# Altium PCB PCB.PcbDoc
Units mm, origin at the board's own origin, x right, y up, seen from the top; angles counter-clockwise.
Board outline 44 x 22 mm, 2 copper layers (Top Layer, Bottom Layer), stack 1.671 mm thick; 26 components, 19 nets, 72 pads, 21 vias.
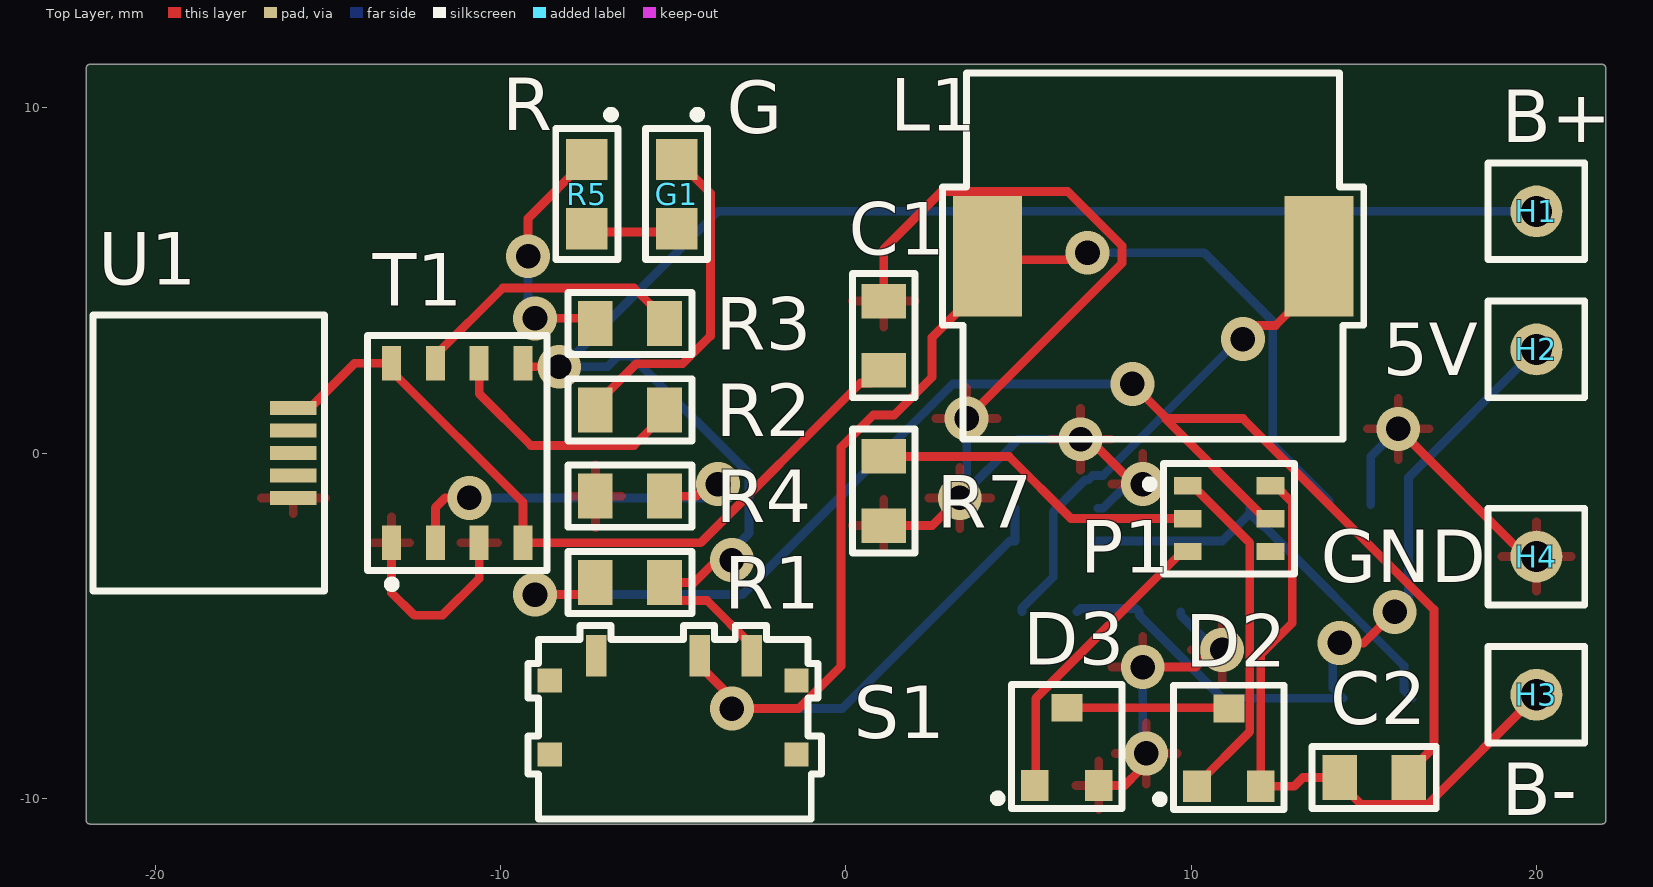
[diagram p0: Top Layer view]
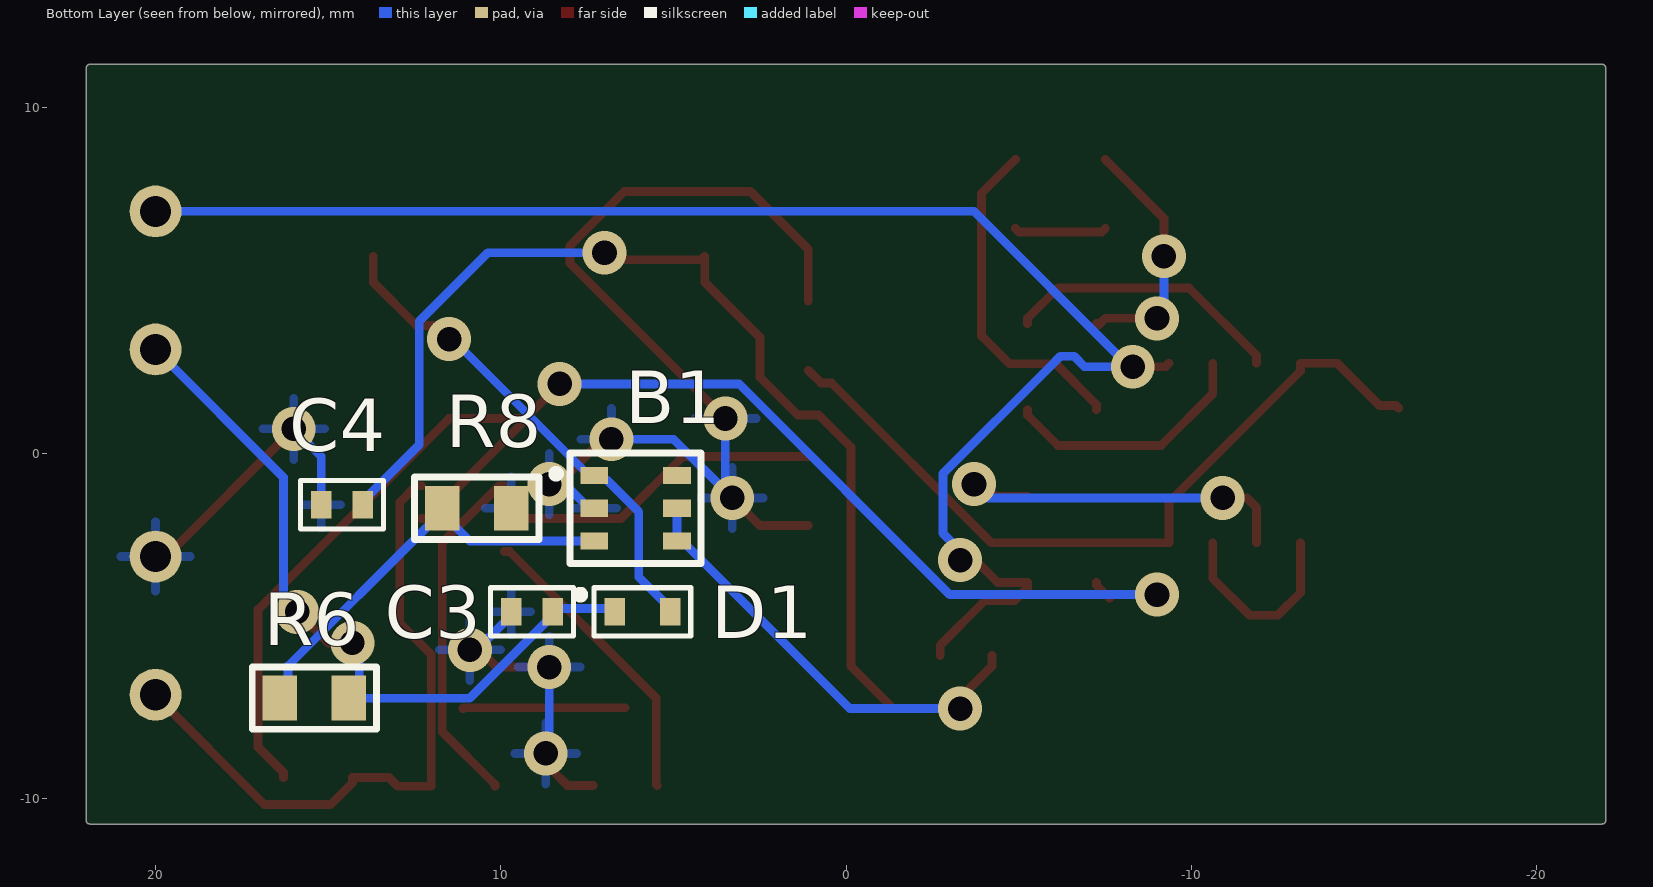
[diagram p1: Bottom Layer view, seen from below]
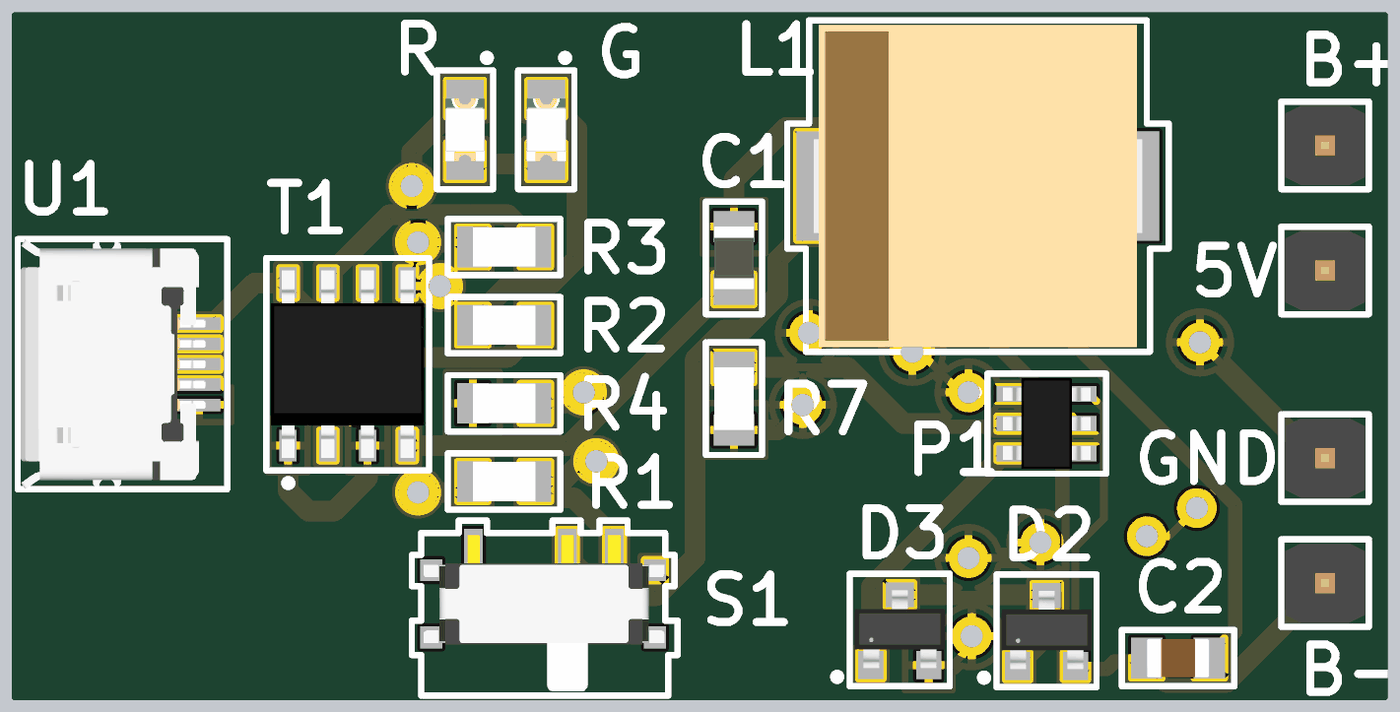
[diagram p2: 3D render of the assembled board from above, using the file's embedded part models]
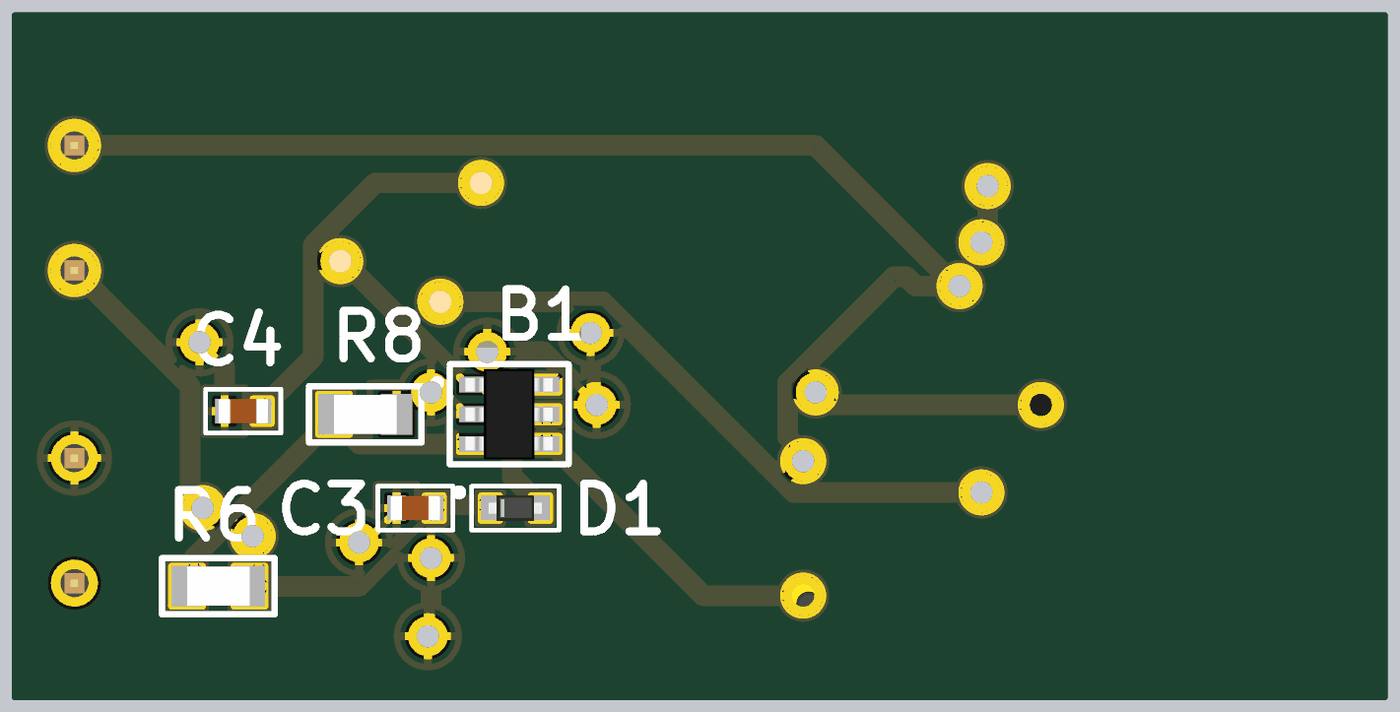
[diagram p3: 3D render of the assembled board from below, using the file's embedded part models]

## Layer stack, top to bottom
Top Solder: solder mask 0.0102, Solder Resist, Dk 3.5
Top Layer: signal copper 0.0356
Dielectric 1: dielectric 1.6, FR-4, Dk 4.8
Bottom Layer: signal copper 0.0356
Bottom Solder: solder mask 0.0102, Solder Resist, Dk 3.5

## Board outline
-21.894,-10.744 cw(c-21.894,-10.644) -21.994,-10.644 -21.994,11.156 cw(c-21.894,11.156) -21.894,11.256 21.906,11.256 cw(c21.906,11.156) 22.006,11.156 22.006,-10.644 cw(c21.906,-10.644) 21.906,-10.744

## Design rules (kind name [scope] priority, off if disabled: settings)
Clearance [All] p1: gap=0 ignorepadtopadclearanceinfootprint=FALSE
HoleToHoleClearance [All] p1: gap=0.1 allowstackedmicrovias=TRUE
MinimumSolderMaskSliver [All] p1: minsoldermaskwidth=0
PolygonConnect [All] p1: connectstyle=Relief reliefconductorwidth=0.254 reliefentries=4 polygonreliefangle="90 Angle" airgapwidth=0.254
RoutingVias [All] p1: holewidth=0.3 width=0.6 viastyle="Through Hole" minholewidth=0.3 minwidth=0.6 maxholewidth=0.3 maxwidth=0.6
SilkToSilkClearance [All] p1: silktosilkclearance=0
SilkToSolderMaskClearance [IsPad] p1: minsilkscreentomaskgap=0 clearancetoexposedcopper=TRUE
SolderMaskExpansion [All] p1: expansion=0.102 istentingtop=FALSE
Width [All] p1: maxlimit=0.254 minlimit=0.254 preferedwidth=0.254
26 further rules are at their usual default settings.

## Components (designator, comment, footprint, x,y, rotation, side; value= is the part's Value field where it differs from the comment)
B1 "MT3608" "BOOST CONVERTER" 6.1,-1.6 r180 bottom
C1 "10uF" "10UF CAPACITOR" 1.1,3.4 r270 top
C2 "0.1uF" "0.1UF CAPACITOR" 15.3,-9.4 r0 top
C3 "22uF" "22UF CAPACITOR" 9.1,-4.6 r180 bottom
C4 "22uF" "22UF CAPACITOR" 14.6,-1.5 r180 bottom
D1 "Schottky Diode" DIODE 5.9,-4.6 r180 bottom
D2 "N-Channel MOSFET" MOSFET 11.095,-8.525 r0 top
D3 "N-Channel MOSFET" MOSFET 6.4,-8.5 r0 top
G1 "Green LED" "GREEN LED" -4.9,7.5 r270 top
H1 "1x1 Header" "HEADER 1X1" 20,7 r0 top
H2 "1x1 Header" "HEADER 1X1" 20,3 r0 top
H3 "1x1 Header" "HEADER 1X1" 20,-7 r0 top
H4 "1x1 Header" "HEADER 1X1" 20,-3 r0 top
L1 "22uH" "22UH INDUCTOR" 8.9,5.7 r0 top
P1 "Protection IC" "PROTECTION IC" 11.1,-1.9 r0 top
R1 "100 Ohms" "100 OHMS" -6.25,-3.75 r0 top
R2 "1K Ohms" "1K RESISTOR" -6.25,1.25 r0 top
R3 "1K Ohms" "1K RESISTOR" -6.25,3.75 r0 top
R4 "2K Ohms" "2K RESISTOR" -6.25,-1.25 r0 top
R5 "Red LED" "RED LED" -7.5,7.5 r270 top
R6 "7.5K Ohms" "7.5K RESISTOR" 15.4,-7.1 r180 bottom
R7 "2K Ohms" "2K RESISTOR" 1.1,-1.1 r90 top
R8 "1K Ohms" "1K RESISTOR" 10.7,-1.6 r0 bottom
S1 "CUS-12TB" "SLIDE SWITCH" -5,-7.3 r180 top
T1 "TP4056" TP4056 -11.25,0 r90 top
U1 "Micro USB" "MICRO USB" -16,0 r90 top

## Footprints (in the part's own frame and the unit in brackets; to place one, negate y for a bottom-side part, rotate by r counter-clockwise, add the part's x,y. Pads: shape width x height; smd on the part's side, far side on the other; paste and mask are expansions set on the pad)
"0.1UF CAPACITOR" [mm]
  rect 1x1.3 smd: 1(-1,0) 2(1,0)
  silkscreen extent -1.8,-0.9 1.8,0.9, body extent -1,-0.62 1,0.63, height 1.4
"1K RESISTOR" [mm]
  rect 1x1.3 smd: 1(-1,0) 2(1,0)
  silkscreen extent -1.8,-0.9 1.8,0.9, body extent -1,-0.62 1,0.62, height 0.61
"2K RESISTOR" [mm]
  rect 1x1.3 smd: 1(-1,0) 2(1,0)
  silkscreen extent -1.8,-0.9 1.8,0.9, body extent -1,-0.62 1,0.62, height 0.66
"7.5K RESISTOR" [mm]
  rect 1x1.3 smd: 1(-1,0) 2(1,0)
  silkscreen extent -1.8,-0.9 1.8,0.9, body extent -1,-0.62 1,0.63, height 0.61
"10UF CAPACITOR" [mm]
  rect 1x1.3 smd: 1(-1,0) 2(1,0)
  silkscreen extent -1.8,-0.9 1.8,0.9, body extent -1,-0.62 1,0.62, height 0.58
"22UF CAPACITOR" [mm]
  rect 0.6x0.8 smd: 1(-0.6,0) 2(0.6,0)
  silkscreen extent -1.2,-0.7 1.2,0.7, body extent -0.8,-0.4 0.8,0.4, height 1
"22UH INDUCTOR" [mm]
  rect 2x3.5 smd: 1(-4.8,0) 2(4.8,0)
  silkscreen extent -6.1,-5.3 6.1,5.3, body extent -5.25,-5.15 5.25,5.15, height 5.05
"100 OHMS" [mm]
  rect 1x1.3 smd: 1(-1,0) 2(1,0)
  silkscreen extent -1.8,-0.9 1.8,0.9, body extent -1,-0.62 1,0.62, height 0.61
"BOOST CONVERTER" [mm]
  rect 0.8x0.5 smd: 1(-1.2,0.95) 2(-1.2,0) 3(-1.2,-0.95) 4(1.2,-0.95) 5(1.2,0) 6(1.2,0.95)
  silkscreen extent -2.4,-1.6 1.9,1.6, body extent -1.4,-1.45 1.4,1.45, height 1.11
DIODE [mm]
  rect 0.6x0.8 smd: 1(-0.8,0) 2(0.8,0)
  silkscreen extent -1.9,-0.7 1.4,0.7, body extent -0.85,-0.41 0.85,0.41, height 0.72
"GREEN LED" [mm]
  rect 1.2x1.2 smd: 1(-1,0) 2(1,0)
  silkscreen extent -2.4,-0.9 1.9,0.9, body extent -1,-0.62 1,0.63, height 0.7
"HEADER 1X1" [mm]
  round 1.5 hole 0.9: 1(0,0)
  silkscreen extent -1.4,-1.4 1.4,1.4, body extent -1.27,-1.27 1.27,1.27, height 5.55
"MICRO USB" [mm]
  rect 0.4x1.35 smd: 1(1.3,0) 2(0.65,0) 3(0,0) 4(-0.65,0) 5(-1.3,0)
  silkscreen extent -4,-0.9 4,5.8, body extent -4,-0.2 4,5.7, height 2.69
MOSFET [mm]
  rect 0.8x0.9 smd: 1(-0.925,-1.125) 3(0.925,-1.125)
  rect 0.9x0.8 smd: 2(0.005,1.125)
  silkscreen extent -2.1,-1.8 1.6,1.8, body extent -1.44,-1.22 1.45,1.27, height 1.09
"PROTECTION IC" [mm]
  rect 0.8x0.5 smd: 1(-1.2,0.95) 2(-1.2,0) 3(-1.2,-0.95) 4(1.2,-0.95) 5(1.2,0) 6(1.2,0.95)
  silkscreen extent -2.4,-1.6 1.9,1.6, body extent -1.4,-1.45 1.4,1.45, height 1.11
"RED LED" [mm]
  rect 1.2x1.2 smd: 1(-1,0) 2(1,0)
  silkscreen extent -2.4,-0.9 1.9,0.9, body extent -1,-0.62 1,0.63, height 0.71
"SLIDE SWITCH" [mm]
  rect 0.6x1.2 smd: 1(-2.275,-1.435) 2(-0.775,-1.435) 3(2.225,-1.435)
  rect 0.7x0.7 smd: 4(-3.575,-0.715) 5(-3.575,1.435) 6(3.575,-0.715) 7(3.575,1.435)
  silkscreen extent -4.3,-2.3 4.2,3.3, body extent -3.88,-1.83 3.82,3.17, height 1.41
TP4056 [mm]
  rect 1x0.55 smd: 1(-2.6,1.905) 2(-2.6,0.635) 3(-2.6,-0.635) 4(-2.6,-1.905) 5(2.6,-1.905) 6(2.6,-0.635) 7(2.6,0.635) 8(2.6,1.905)
  silkscreen extent -3.9,-2.6 3.4,2.6, body extent -3,-2.45 3,2.45, height 1.38

## Part data
B1: "BOOST CONVERTER IC"
C1: library part CC0805ZKY5V5BB106, "Cap Ceramic 10uF 6.3V Y5V -20% to 80% Pad SMD 0805 85C Automotive T/R", Case Code (Imperial)=0805, Case Code (Metric)=2012, Dielectric=Y5V, Manufacturer=Yageo, Max Operating Temperature=85°C, Min Operating Temperature=-30°C, Package Quantity=1, Supplier Part Number 1=311-1462-1-ND, Tolerance=80%, Voltage Rating=6.3V, Capacitance=10uF, Case/Package=0805, Category="Ceramic Capacitors", ComponentLink1Description=https://datasheet.ciiva.com/180/mlccorderingcode-180353.pdf?src-supplier=Digi-Key, ComponentLink1URL=https://datasheet.ciiva.com/180/mlccorderingcode-180353.pdf?src-supplier=Digi-Key, ComponentLink2Description=https://datasheet.ciiva.com/180/mlccorderingcode-180354.pdf?src-supplier=Digi-Key, ComponentLink2URL=https://datasheet.ciiva.com/180/mlccorderingcode-180354.pdf?src-supplier=Digi-Key, ComponentLink3Description=https://datasheet.ciiva.com/180/mlccorderingcode-180355.pdf?src-supplier=Digi-Key, ComponentLink3URL=https://datasheet.ciiva.com/180/mlccorderingcode-180355.pdf?src-supplier=Digi-Key, ComponentLink4Description=https://datasheet.ciiva.com/11465/upy-gphc-y5v-6-3v-to-50v-5-11465830.pdf?src-supplier=Avnet, ComponentLink4URL=https://datasheet.ciiva.com/11465/upy-gphc-y5v-6-3v-to-50v-5-11465830.pdf?src-supplier=Avnet, ComponentLink5Description=https://datasheet.ciiva.com/17436/upy-gphc-y5v-6-3v-to-50v-5-17436535.pdf?src-supplier=Avnet+Europe, ComponentLink5URL=https://datasheet.ciiva.com/17436/upy-gphc-y5v-6-3v-to-50v-5-17436535.pdf?src-supplier=Avnet+Europe, ComponentLink6Description=https://datasheet.ciiva.com/13211/upy-gp-np0-16v-to-50v-8-13211102.pdf?src-supplier=Mouser, ComponentLink6URL=https://datasheet.ciiva.com/13211/upy-gp-np0-16v-to-50v-8-13211102.pdf?src-supplier=Mouser, Composition=Ceramic, Depth=1.25mm, Halogen Free="Halogen Free", Height=1.25mm, Lead Free="Lead Free", Length=2mm, Manufacturer Part Number=CC0805ZKY5V5BB106, Mount="Surface Mount", Number of Pins=2, Packaging="Tape and Reel", Pricing 1="1=0.18000, 10=0.12600, 50=0.07560, 100=0.06380, 500=0.04364, 1000=0.03861 (USD)", Radiation Hardening=No, RoHS=Yes, Stock 1=41988, Supplier 1=Digi-Key, Thickness=0.057inch, Voltage Rating (DC)=6.3V, Width=0.049inch
C2: library part GCM21BR72A104KA37L, "CAP CER 0.1UF 100V X7R 0805", Capacitance=100nF, Case Code (Imperial)=0805, Case Code (Metric)=2012, Dielectric=X7R, Manufacturer=Murata, Max Operating Temperature=125°C, Min Operating Temperature=-55°C, Package Quantity=1, Ratings=AEC-Q200, Supplier Part Number 1=490-4789-1-ND, Tolerance=10%, Voltage=100V, Case/Package=0805, Category="Ceramic Capacitors", ComponentLink1Description=https://datasheet.ciiva.com/2989/product-2989248.pdf?src-supplier=Avnet, ComponentLink1URL=https://datasheet.ciiva.com/2989/product-2989248.pdf?src-supplier=Avnet, ComponentLink2Description=https://datasheet.ciiva.com/18183/getdatasheetpartid-248062-18183712.pdf?src-supplier=Verical, ComponentLink2URL=https://datasheet.ciiva.com/18183/getdatasheetpartid-248062-18183712.pdf?src-supplier=Verical, ComponentLink3Description=https://datasheet.ciiva.com/11786/0900766b80ef92d0-11786205.pdf?src-supplier=RSComponents, ComponentLink3URL=https://datasheet.ciiva.com/11786/0900766b80ef92d0-11786205.pdf?src-supplier=RSComponents, ComponentLink4Description=https://datasheet.ciiva.com/135/product-135646.pdf?src-supplier=Digi-Key, ComponentLink4URL=https://datasheet.ciiva.com/135/product-135646.pdf?src-supplier=Digi-Key, ComponentLink5Description=https://datasheet.ciiva.com/135/product-135647.pdf?src-supplier=Digi-Key, ComponentLink5URL=https://datasheet.ciiva.com/135/product-135647.pdf?src-supplier=Digi-Key, ComponentLink6Description=https://datasheet.ciiva.com/135/product-135648.pdf?src-supplier=Digi-Key, ComponentLink6URL=https://datasheet.ciiva.com/135/product-135648.pdf?src-supplier=Digi-Key, ComponentLink7Description=https://datasheet.ciiva.com/48671/product-48671358.pdf?src-supplier=Avnet, ComponentLink7URL=https://datasheet.ciiva.com/48671/product-48671358.pdf?src-supplier=Avnet, ComponentLink8Description=https://datasheet.ciiva.com/16449/product-16449295.pdf?src-supplier=Future+Electronics, ComponentLink8URL=https://datasheet.ciiva.com/16449/product-16449295.pdf?src-supplier=Future+Electronics, Depth=1.25mm, Height=1.25mm, Lead Free="Lead Free", Length=2mm, Manufacturer Part Number=GCM21BR72A104KA37L, Mount="Surface Mount", Packaging="Tape and Reel", Pricing 1="1=0.31000, 10=0.20900, 50=0.13940, 100=0.11850, 500=0.08366, 1000=0.07321 (USD)", Radiation Hardening=No, REACH SVHC="No SVHC", RoHS=Yes, Stock 1=11397818, Supplier 1=Digi-Key, Termination=SMD/SMT, Thickness=0.055inch, Voltage Rating=100V, Voltage Rating (DC)=100V, Width=0.049inch
C3 C4: library part GRM188C80J226ME15D, "CAP CER 22UF 6.3V X6S 0603", Case Code (Imperial)=0603, Case Code (Metric)=1608, Dielectric=X6S, Manufacturer=Murata, Max Operating Temperature=105°C, Min Operating Temperature=-55°C, Package Quantity=4000, Supplier Part Number 1=490-10471-1-ND, Tolerance=20%, Voltage Rating=6.3V, Capacitance=22uF, Case/Package=0603, Category="Ceramic Capacitors", ComponentLink1Description=http://www.mouser.com/ds/2/281/c02e-2905.pdf?src-supplier=Mouser, ComponentLink1URL=http://www.mouser.com/ds/2/281/c02e-2905.pdf?src-supplier=Mouser, ComponentLink2Description=http://search.murata.co.jp/Ceramy/image/img/A01X/partnumbering_e_01.pdf?src-supplier=Digi-Key, ComponentLink2URL=http://search.murata.co.jp/Ceramy/image/img/A01X/partnumbering_e_01.pdf?src-supplier=Digi-Key, ComponentLink3Description=http://search.murata.co.jp/Ceramy/image/img/A01X/G101/ENG/GRM188C80J226ME15-01.pdf?src-supplier=Digi-Key, ComponentLink3URL=http://search.murata.co.jp/Ceramy/image/img/A01X/G101/ENG/GRM188C80J226ME15-01.pdf?src-supplier=Digi-Key, Height=0.8mm, Lead Free="Lead Free", Length=0.063inch, Manufacturer Part Number=GRM188C80J226ME15D, Mount="Surface Mount", Packaging="Tape and Reel", Pricing 1="1=0.32000, 10=0.21900, 50=0.14560, 100=0.12380, 500=0.08742, 1000=0.07648 (USD)", RoHS=Yes, Stock 1=219534, Supplier 1=Digi-Key, Termination=SMD/SMT, Thickness=0.039inch, Voltage Rating (DC)=6.3V, Weight=0.000222oz, Width=0.8mm
D1: library part SDM03U40-7, "Diode Schottky 40V 0.03A 2Pin SOD523", Average Rectified Current=30mA, Capacitance=6pF, Forward Voltage=370mV, Manufacturer=Diodes, Max Forward Surge Current (Ifsm)=200mA, Max Operating Temperature=125°C, Max Power Dissipation=150mW, Max Repetitive Reverse Voltage (Vrrm)=40V, Max Reverse Voltage (DC)=30V, Min Operating Temperature=-40°C, Package Quantity=3000, Peak Reverse Current=500nA, Supplier Part Number 1=SDM03U40DICT-ND, Category="Rectifier Diodes", ComponentLink1Description=https://datasheet.ciiva.com/4715/ds30392-87516-4715617.pdf?src-supplier=Mouser, ComponentLink1URL=https://datasheet.ciiva.com/4715/ds30392-87516-4715617.pdf?src-supplier=Mouser, ComponentLink2Description=https://datasheet.ciiva.com/8301/ds30392-8301153.pdf?src-supplier=Avnet, ComponentLink2URL=https://datasheet.ciiva.com/8301/ds30392-8301153.pdf?src-supplier=Avnet, ComponentLink3Description=https://datasheet.ciiva.com/15144/getdatasheetpartid-38927-15144053.pdf?src-supplier=Verical, ComponentLink3URL=https://datasheet.ciiva.com/15144/getdatasheetpartid-38927-15144053.pdf?src-supplier=Verical, ComponentLink4Description=https://datasheet.ciiva.com/912/ds30392-912843.pdf?src-supplier=Digi-Key, ComponentLink4URL=https://datasheet.ciiva.com/912/ds30392-912843.pdf?src-supplier=Digi-Key, ComponentLink5Description=https://datasheet.ciiva.com/912/ds30392-912844.pdf?src-supplier=Digi-Key, ComponentLink5URL=https://datasheet.ciiva.com/912/ds30392-912844.pdf?src-supplier=Digi-Key, ComponentLink6Description=https://datasheet.ciiva.com/912/ds30392-912845.pdf?src-supplier=Digi-Key, ComponentLink6URL=https://datasheet.ciiva.com/912/ds30392-912845.pdf?src-supplier=Digi-Key, Current Rating=30mA, Element Configuration=Single, Forward Current=30mA, Height=0.65mm, Lead Free="Lead Free", Length=1.3mm, Manufacturer Part Number=SDM03U40-7, Mount="Surface Mount", Number of Pins=2, Output Current=30mA, Packaging="Tape and Reel", Peak Non-Repetitive Surge Current=200mA, Polarity=Standard, Power Dissipation=150mW, Power Rating=150mW, Pricing 1="1=0.20000, 10=0.13600, 100=0.07270, 500=0.04166, 1000=0.03485 (USD)", Radiation Hardening=No, RoHS=Yes, Stock 1=40570, Supplier 1=Digi-Key, Termination=SMD/SMT, Voltage Rating (DC)=40V, Weight=3.5E-05oz, Width=0.9mm
D2 D3: library part DMN65D8L-7, "N-Channel Enhancement MOSFET SOT-23", Case/Package=SOT-23, Continuous Drain Current (ID)=310mA, Drain to Source Breakdown Voltage=60V, Drain to Source Resistance=2R, Gate to Source Voltage (Vgs)=20V, Input Capacitance=22pF, Manufacturer=Diodes, Max Operating Temperature=150°C, Max Power Dissipation=370mW, Min Operating Temperature=-55°C, Package Quantity=1, Power Dissipation=540mW, Supplier Part Number 1=DMN65D8L-7DICT-ND, Threshold Voltage=2V, Category=MOSFETs, ComponentLink1Description=https://datasheet.ciiva.com/6371/dmn65d8l-6371124.pdf?src-supplier=Digi-Key, ComponentLink1URL=https://datasheet.ciiva.com/6371/dmn65d8l-6371124.pdf?src-supplier=Digi-Key, ComponentLink2Description=https://datasheet.ciiva.com/13058/dmn65d8l-219098-13058455.pdf?src-supplier=Mouser, ComponentLink2URL=https://datasheet.ciiva.com/13058/dmn65d8l-219098-13058455.pdf?src-supplier=Mouser, ComponentLink3Description=https://datasheet.ciiva.com/6371/dmn65d8l-6371126.pdf?src-supplier=Digi-Key, ComponentLink3URL=https://datasheet.ciiva.com/6371/dmn65d8l-6371126.pdf?src-supplier=Digi-Key, ComponentLink4Description=https://datasheet.ciiva.com/6371/dmn65d8l-6371128.pdf?src-supplier=Digi-Key, ComponentLink4URL=https://datasheet.ciiva.com/6371/dmn65d8l-6371128.pdf?src-supplier=Digi-Key, Drain to Source Voltage (Vdss)=60V, Element Configuration=Single, FET Type="1 N-Channel", Height=1.1mm, Lead Free="Lead Free", Length=3mm, Manufacturer Part Number=DMN65D8L-7, Mount="Surface Mount", Number of Channels=1, Number of Elements=1, Number of Pins=3, Packaging="Tape and Reel", Pricing 1="1=0.17000, 10=0.15100, 25=0.14400, 100=0.06330, 250=0.06076, 500=0.04972, 1000=0.03453 (USD)", Rds On Max=3R, REACH SVHC="No SVHC", Rise Time=2.8ns, RoHS=Yes, Stock 1=211297, Supplier 1=Digi-Key, Turn-Off Delay Time=12.6ns, Turn-On Delay Time=2.7ns, Weight=0.000282oz, Width=1.4mm
G1: library part 150080GS75000, "SMD LED green 3.5 V 0805, 150080GS75000, Würth Elektronik", Case Code (Imperial)=0805, Case Code (Metric)=2012, Color=Green, Forward Current=30mA, Forward Voltage=3.2V, Manufacturer="Wurth Electronics", Max Operating Temperature=85°C, Min Operating Temperature=-40°C, Package Quantity=4000, Supplier Part Number 1=732-4983-1-ND, Test Current=20mA, Case/Package=0805, Category=LEDs, ComponentLink1Description=https://datasheet.ciiva.com/29563/150080gs75000-29563008.pdf?src-supplier=Digi-Key, ComponentLink1URL=https://datasheet.ciiva.com/29563/150080gs75000-29563008.pdf?src-supplier=Digi-Key, ComponentLink2Description=https://datasheet.ciiva.com/29279/759434-da-01-en-chipled-0805-w-kl-gruen-150080gs75000-29279039.pdf?src-supplier=Conrad, ComponentLink2URL=https://datasheet.ciiva.com/29279/759434-da-01-en-chipled-0805-w-kl-gruen-150080gs75000-29279039.pdf?src-supplier=Conrad, Dominant Wavelength=520nm, Height=0.7mm, Length=2mm, Lens Style=Clear,Rectangular, Luminous Intensity=450mcd, Manufacturer Part Number=150080GS75000, Mount="Surface Mount", Packaging="Cut Tape", Pricing 1="1=0.18000, 50=0.16500, 100=0.14200, 500=0.12300 (USD)", REACH SVHC=Unknown, RoHS=Yes, Stock 1=23160, Supplier 1=Digi-Key, Viewing Angle=140°, Wavelength=520nm, Width=1.25mm
H1 H2 H3 H4: library part 61300111121, "CONN HEADER VERT 1POS", Color=Black, Manufacturer="Wurth Electronics", Supplier Part Number 1=732-5314-ND, Category=Connectors, ComponentLink1Description=http://www.farnell.com/cad/1737268.pdf?src-supplier=Element14, ComponentLink1URL=http://www.farnell.com/cad/1737268.pdf?src-supplier=Element14, ComponentLink2Description=https://katalog.we-online.de/em/datasheet/6130xx11121.pdf?src-supplier=Digi-Key, ComponentLink2URL=https://katalog.we-online.de/em/datasheet/6130xx11121.pdf?src-supplier=Digi-Key, Connector Type="Male Pin", Contact Material=Copper, Contact Mating Length=0.236inch, Contact Plating=Gold, Gender=Male, Manufacturer Part Number=61300111121, Mount="Through Hole", Number of Contacts=1, Number of Positions=1, Number of Rows=1, Packaging=Bulk, Pricing 1="1=0.13000, 10=0.10600, 25=0.08800, 50=0.07400, 100=0.06700, 1000=0.06100 (USD)", REACH SVHC=Unknown, RoHS=Yes, Stock 1=9604, Supplier 1=Digi-Key, Termination=Solder
L1: library part 7447714220, "Ind Power Shielded Wirewound 22uH 20% 100KHz Ferrite 3A T/R", Case/Package=Nonstandard, Current Rating=3A, DC Resistance (DCR)=50mR, Inductance Tolerance=20%, Manufacturer="Wurth Electronics", Max Operating Temperature=125°C, Min Operating Temperature=-40°C, Package Quantity=500, Saturation Current=3.6A, Self Resonant Frequency=14.5MHz, Supplier Part Number 1=732-2992-1-ND, Test Frequency=100kHz, Category="Fixed Inductors", ComponentLink1Description=https://datasheet.ciiva.com/1058/7447714220-1058608.pdf?src-supplier=Digi-Key, ComponentLink1URL=https://datasheet.ciiva.com/1058/7447714220-1058608.pdf?src-supplier=Digi-Key, ComponentLink2Description=https://datasheet.ciiva.com/30489/0900766b81281c0b-30489748.pdf?src-supplier=RSComponents, ComponentLink2URL=https://datasheet.ciiva.com/30489/0900766b81281c0b-30489748.pdf?src-supplier=RSComponents, ComponentLink3Description=https://datasheet.ciiva.com/13320/7447714220-70113-13320863.pdf?src-supplier=Mouser, ComponentLink3URL=https://datasheet.ciiva.com/13320/7447714220-70113-13320863.pdf?src-supplier=Mouser, ComponentLink4Description=https://datasheet.ciiva.com/1058/7447714220-1058609.pdf?src-supplier=Digi-Key, ComponentLink4URL=https://datasheet.ciiva.com/1058/7447714220-1058609.pdf?src-supplier=Digi-Key, ComponentLink5Description=https://datasheet.ciiva.com/7691/1736273-7691674.pdf?src-supplier=Element14, ComponentLink5URL=https://datasheet.ciiva.com/7691/1736273-7691674.pdf?src-supplier=Element14, ComponentLink6Description=https://datasheet.ciiva.com/48691/001087798-da-01-ml-we-pd-smd-speicherdrossel-74477142-de-en-48691509.pdf?src-supplier=Conrad, ComponentLink6URL=https://datasheet.ciiva.com/48691/001087798-da-01-ml-we-pd-smd-speicherdrossel-74477142-de-en-48691509.pdf?src-supplier=Conrad, Composition=Wirewound, Core Material=Ferrite, Depth=10mm, Height=5mm, Height - Seated (Max)=0.197inch, Inductance=22uH, Length=10mm, Manufacturer Part Number=7447714220, Max DC Current=3A, Mount="Surface Mount", Packaging="Cut Tape", Pricing 1="1=2.12000, 10=2.03800, 50=1.84000, 100=1.65000, 250=1.51000 (USD)", REACH SVHC=Unknown, Resistance=50mR, RMS Current (Irms)=3A, RoHS=Yes, Series Resistance=50mR, Shielding=Shielded, Stock 1=7442, Supplier 1=Digi-Key, Termination=SMD/SMT, Tolerance=20%, Width=10mm
P1: library part FS312F-G, "PROTECTION IC"
R1: library part RNCP0805FTD100R, "RES SMD 100 OHM 1% 1/4W 0805", Case Code (Imperial)=0805, Case Code (Metric)=2012, Manufacturer="Stackpole Electronics", Max Operating Temperature=155°C, Max Power Dissipation=250mW, Min Operating Temperature=-55°C, Resistance=100R, Supplier Part Number 1=RNCP0805FTD100RCT-ND, Temperature Coefficient=100ppm/°C, Tolerance=1%, Case/Package=0805, Category="Chip SMD Resistors", ComponentLink1Description=http://www.seielect.com/Catalog/SEI-rncp.pdf?src-supplier=Digi-Key, ComponentLink1URL=http://www.seielect.com/Catalog/SEI-rncp.pdf?src-supplier=Digi-Key, ComponentLink2Description=https://www.seielect.com/catalog/SEI-Packaging.pdf?src-supplier=Digi-Key, ComponentLink2URL=https://www.seielect.com/catalog/SEI-Packaging.pdf?src-supplier=Digi-Key, Composition="Thin Film", Features="Moisture Resistant,Anti-Sulfur", Height=0.024inch, Lead Free="Lead Free", Length=0.079inch, Manufacturer Part Number=RNCP0805FTD100R, Mount="Surface Mount", Number of Terminations=2, Packaging="Tape and Reel", Pricing 1="1=0.10000, 10=0.06600, 100=0.02550, 1000=0.01120, 2500=0.00967 (USD)", RoHS=Yes, Stock 1=171227, Supplier 1=Digi-Key, Width=0.049inch
R2 R3 R8: library part RNCP0805FTD1K00, "RES 1K OHM 1% 1/4W 0805", Case Code (Imperial)=0805, Case Code (Metric)=2012, Manufacturer="Stackpole Electronics", Max Operating Temperature=155°C, Max Power Dissipation=250mW, Min Operating Temperature=-55°C, Resistance=1kR, Supplier Part Number 1=RNCP0805FTD1K00CT-ND, Temperature Coefficient=100ppm/°C, Tolerance=1%, Case/Package=0805, Category="Chip SMD Resistors", ComponentLink1Description=http://www.seielect.com/Catalog/SEI-rncp.pdf?src-supplier=Future+Electronics, ComponentLink1URL=http://www.seielect.com/Catalog/SEI-rncp.pdf?src-supplier=Future+Electronics, ComponentLink2Description=https://www.seielect.com/catalog/SEI-Packaging.pdf?src-supplier=Digi-Key, ComponentLink2URL=https://www.seielect.com/catalog/SEI-Packaging.pdf?src-supplier=Digi-Key, ComponentLink3Description=https://www.seielect.com/Catalog/SEI-rncp.pdf?src-supplier=Digi-Key, ComponentLink3URL=https://www.seielect.com/Catalog/SEI-rncp.pdf?src-supplier=Digi-Key, Composition="Thin Film", Features="Moisture Resistant,Anti-Sulfur", Height=0.024inch, Lead Free="Lead Free", Length=0.079inch, Manufacturer Part Number=RNCP0805FTD1K00, Mount="Surface Mount", Number of Terminations=2, Packaging="Tape and Reel", Power Rating=250mW, Pricing 1="1=0.10000, 10=0.06600, 100=0.02550, 1000=0.01120, 2500=0.00967 (USD)", RoHS=Yes, Stock 1=425201, Supplier 1=Digi-Key, Width=0.049inch
R4 R7: library part RNCF0805TKY2K00, "RES SMD 2K OHM 0.01% 1/8W 0805", Case Code (Imperial)=0805, Case Code (Metric)=2012, Manufacturer="Stackpole Electronics", Max Operating Temperature=155°C, Max Power Dissipation=125mW, Min Operating Temperature=-55°C, Resistance=2kR, Supplier Part Number 1=RNCF0805TKY2K00CT-ND, Temperature Coefficient=5ppm/°C, Tolerance=0.01%, Case/Package=0805, Category="Chip SMD Resistors", ComponentLink1Description=https://www.seielect.com/Catalog/SEI-RNCF.pdf?src-supplier=Digi-Key, ComponentLink1URL=https://www.seielect.com/Catalog/SEI-RNCF.pdf?src-supplier=Digi-Key, ComponentLink2Description=https://www.seielect.com/catalog/SEI-Packaging.pdf?src-supplier=Digi-Key, ComponentLink2URL=https://www.seielect.com/catalog/SEI-Packaging.pdf?src-supplier=Digi-Key, Composition="Thin Film", Features="Moisture Resistant", Height=0.026inch, Length=0.079inch, Manufacturer Part Number=RNCF0805TKY2K00, Mount="Surface Mount", Number of Terminations=2, Packaging="Tape and Reel", Pricing 1="1=1.97000, 10=1.74900, 100=1.33560 (USD)", RoHS=Yes, Stock 1=3852, Supplier 1=Digi-Key, Width=0.049inch
R5: library part 150080RS75000, "SMD LED red 2.4 V 0805, 150080RS75000, Würth Elektronik", Case Code (Imperial)=0805, Case Code (Metric)=2012, Color=Red, Forward Current=30mA, Forward Voltage=2V, Manufacturer="Wurth Electronics", Max Operating Temperature=85°C, Min Operating Temperature=-40°C, Package Quantity=4000, Supplier Part Number 1=732-4984-1-ND, Test Current=20mA, Case/Package=0805, Category=LEDs, ComponentLink1Description=https://datasheet.ciiva.com/22656/150080rs75000-22656961.pdf?src-supplier=Element14, ComponentLink1URL=https://datasheet.ciiva.com/22656/150080rs75000-22656961.pdf?src-supplier=Element14, ComponentLink2Description=https://datasheet.ciiva.com/29279/759435-da-01-en-chipled-0805-w-kl-rot-150080rs75000-29279032.pdf?src-supplier=Conrad, ComponentLink2URL=https://datasheet.ciiva.com/29279/759435-da-01-en-chipled-0805-w-kl-rot-150080rs75000-29279032.pdf?src-supplier=Conrad, Dominant Wavelength=625nm, Height=0.7mm, Length=2mm, Lens Style=Clear,Rectangular, Luminous Intensity=150mcd, Manufacturer Part Number=150080RS75000, Mount="Surface Mount", Packaging="Tape and Reel", Pricing 1="1=0.18000, 50=0.16500, 100=0.14200, 500=0.12300 (USD)", REACH SVHC=Unknown, RoHS=Yes, Stock 1=60927, Supplier 1=Digi-Key, Viewing Angle=140°, Wavelength=625nm, Width=1.25mm
R6: library part RNCP0805FTD7K50, "RES SMD 7.5K OHM 1% 1/4W 0805", Case Code (Imperial)=0805, Case Code (Metric)=2012, Manufacturer="Stackpole Electronics", Max Operating Temperature=155°C, Max Power Dissipation=250mW, Min Operating Temperature=-55°C, Resistance=7.5kR, Supplier Part Number 1=RNCP0805FTD7K50CT-ND, Temperature Coefficient=100ppm/°C, Tolerance=1%, Case/Package=0805, Category="Chip SMD Resistors", ComponentLink1Description=http://www.seielect.com/Catalog/SEI-rncp.pdf?src-supplier=Digi-Key, ComponentLink1URL=http://www.seielect.com/Catalog/SEI-rncp.pdf?src-supplier=Digi-Key, ComponentLink2Description=https://www.seielect.com/catalog/SEI-Packaging.pdf?src-supplier=Digi-Key, ComponentLink2URL=https://www.seielect.com/catalog/SEI-Packaging.pdf?src-supplier=Digi-Key, Composition="Thin Film", Features="Moisture Resistant,Anti-Sulfur", Height=0.024inch, Length=0.079inch, Manufacturer Part Number=RNCP0805FTD7K50, Mount="Surface Mount", Number of Terminations=2, Packaging="Tape and Reel", Pricing 1="1=0.10000, 10=0.06900, 100=0.02640, 1000=0.01162, 2500=0.01003 (USD)", RoHS=Yes, Stock 1=16530, Supplier 1=Digi-Key, Width=0.049inch
S1: "SWITCH SLIDE SPDT 300MA 4V", Current Rating=300mA, Manufacturer="Nidec Copal", Max Operating Temperature=70°C, Max Voltage Rating (DC)=20V, Min Operating Temperature=-20°C, Operating Force=204gf, Supplier Part Number 1=563-1102-1-ND, Voltage Rating (DC)=4V, Actuator Length=1.5mm, Actuator Material=Nylon,Polyamide, Actuator Type=Standard, Category="Slide Switches", ComponentLink1Description=https://datasheet.ciiva.com/2889/cus-2889431.pdf?src-supplier=Digi-Key, ComponentLink1URL=https://datasheet.ciiva.com/2889/cus-2889431.pdf?src-supplier=Digi-Key, ComponentLink2Description=https://datasheet.ciiva.com/2889/cus-2889432.pdf?src-supplier=Digi-Key, ComponentLink2URL=https://datasheet.ciiva.com/2889/cus-2889432.pdf?src-supplier=Digi-Key, ComponentLink3Description=https://datasheet.ciiva.com/2889/cus-2889433.pdf?src-supplier=Digi-Key, ComponentLink3URL=https://datasheet.ciiva.com/2889/cus-2889433.pdf?src-supplier=Digi-Key, Contact Material="Copper Alloy", Contact Plating=Gold, Contact Style=Non-Shorting, Electrical Life=10000Cycles, Manufacturer Part Number=CUS-12TB, Mount="Surface Mount", Orientation="Right Angle", Packaging="Tape and Reel", Pricing 1="1=0.70000, 10=0.67000, 25=0.64400, 100=0.55890, 250=0.50996, 500=0.47390, 1000=0.42496 (USD)", Radiation Hardening=No, RoHS=Yes, Stock 1=15160, Supplier 1=Digi-Key, Switch Function=On-On, Switch Travel=1.5mm, Termination="Gull Wing", Throw Configuration=SPDT
T1: "Li-ION/LI-PO CHARGE IC"
U1: library part 629105136821, "WURTH ELEKTRONIK - 629105136821 - Connecteur USB, Micro USB Type B, USB 2.0, Embase, 5 Voies, Montage en surface, Coudée", Color=Black, Current Rating=1.8A, Flammability Rating="UL94 V-0", Insulation Resistance=1GR, Manufacturer="Wurth Electronics", Max Operating Temperature=105°C, Min Operating Temperature=-40°C, Package Quantity=1400, Supplier Part Number 1=732-3155-1-ND, Voltage Rating=30V, Category=Connectors, ComponentLink1Description=https://datasheet.ciiva.com/851/629105136821-851196.pdf?src-supplier=Digi-Key, ComponentLink1URL=https://datasheet.ciiva.com/851/629105136821-851196.pdf?src-supplier=Digi-Key, ComponentLink2Description=https://datasheet.ciiva.com/12494/629105136821-221118-12494781.pdf?src-supplier=Mouser, ComponentLink2URL=https://datasheet.ciiva.com/12494/629105136821-221118-12494781.pdf?src-supplier=Mouser, ComponentLink3Description=https://datasheet.ciiva.com/851/629105136821-851197.pdf?src-supplier=Digi-Key, ComponentLink3URL=https://datasheet.ciiva.com/851/629105136821-851197.pdf?src-supplier=Digi-Key, ComponentLink4Description=https://datasheet.ciiva.com/851/629105136821-851198.pdf?src-supplier=Digi-Key, ComponentLink4URL=https://datasheet.ciiva.com/851/629105136821-851198.pdf?src-supplier=Digi-Key, Connector Type=USB, Contact Material="Copper Alloy", Contact Plating=Gold, Gender=Receptacle, Lead Free="Lead Free", Length=5.9mm, Manufacturer Part Number=629105136821, Mount="Surface Mount,Horizontal", Number of Contacts=5, Number of Ports=1, Number of Positions=5, Orientation="Right Angle", Packaging="Tape and Reel", Plating=Nickel, Pricing 1="1=1.21000, 10=1.19200, 50=1.10700, 100=1.02100, 500=0.93600 (USD)", REACH SVHC=Unknown, RoHS=Yes, Stock 1=8625, Supplier 1=Digi-Key, Termination=Solder, USB Standard="USB 2.0"

## Via types
v1: diameter 1.27, hole 0.711, Top Layer to Bottom Layer, 21 vias

## Nets (pads, with @x,y where several pads share a name; then routed paths per layer and width w, separated by ;. In a path a pad name is that pad's centre, name@x,y a point inside that pad or via, vN(x,y) a via of type N, cw(c..) or ccw(c..) an arc to the next point about the centre after c; other vN are vias at no path point)
0.1uf: C2.2 P1.5 R1.1 | length 42.7
  Top Layer w0.254: v1(-9,-4.1) -7.723,-4.1 -7.623,-4.2 -7.25,-3.827 R1.1 ; v1(8.3,2) 9.3,1 11.5,1 17.032,-4.532 17.032,-8.518 16.3,-9.25 C2.2 ; 9.275,0.975 12.15,-1.9 P1.5
  Bottom Layer w0.254: v1(-9,-4.1) -3,-4.1 3.1,2 v1(8.3,2)
2K: R4.2 T1.2 | length 11.2
  Top Layer w0.254: T1.2 -11.885,-1.585 -11.6,-1.3 v1(-10.9,-1.3) ; R4.2 -4.325,-1.25 -3.975,-0.9 v1(-3.7,-0.9)
  Bottom Layer w0.254: v1(-10.9,-1.3) -4.1,-1.3 v1(-3.7,-0.9)
22uH: B1.1 D1.2 L1.2 | length 14.5
  Top Layer w0.254: v1(11.5,3.3) 11.894,3.694 12.444,3.694 13.7,4.95 L1.2
  Bottom Layer w0.254: D1.2 5.1,-4.5 6.008,-3.592 6.008,-1.704 6.938,-0.773 7.027,-0.773 7.15,-0.65 B1.1 7.45,-0.65 11.4,3.3 v1(11.5,3.3)
CE: C1.2 T1.4 T1.8 U1.1 | length 22.7
  Top Layer w0.254: U1.1 -15.927,1.373 -15.452,1.373 -14.225,2.6 T1.8 -13.155,2.375 -9.345,-1.435 T1.4 -4.2,-2.6 0.427,2.027 0.727,2.027 C1.2
GND: B1.2 C1.1 C3.1 C4.1 D3.3 H4.1 R4.1 R7.1 R8.1 T1.1 T1.3 U1.5 | length 52.2
  Top Layer w0.254: T1.1 -13.155,-4.045 -12.5,-4.7 -11.682,-4.7 -10.615,-3.633 T1.3 ; R7.1 2.5,-2.1 v1(3.3,-1.3) ; C1.1 1.1,5.9 2.777,7.577 6.423,7.577 8,6 8,5.5 v1(3.5,1) ; v1(6.8,0.4) 7.05,0.4 8.35,-0.9 v1(8.6,-0.9) ; D3.3 8.075,-9.625 8.506,-9.194 8.506,-8.894 v1(8.7,-8.7) ; v1(8.6,-6.2) 10.125,-6.2 10.625,-5.7 v1(10.9,-5.7) ; v1(16,0.7) 19.7,-3 H4.1
  Bottom Layer w0.254: v1(3.5,1) 3.5,-1.1 v1(3.3,-1.3) 5,0.4 v1(6.8,0.4) ; B1.2 7.45,-1.6 8.15,-0.9 v1(8.6,-0.9) ; v1(8.6,-6.2) 8.6,-8.6 v1(8.7,-8.7) ; C3.1 9.7,-4.7 10.7,-5.7 v1(10.9,-5.7) ; C4.1 15.2,-0.1 v1(16,0.7)
NetB1_3: B1.3 R6.1 R8.2 | length 12.4
  Bottom Layer w0.254: B1.3 10.9,-2.55 R8.2@11.7,-1.75 ; R6.1 16.168,-6.868 16.168,-6.168 12.123,-2.123 12.073,-2.123 R8.2@11.7,-1.75 ; R8.2@11.7,-1.75 R8.2 R8.2@11.7,-1.75
NetC2_1: C2.1 D2.3 H3.1 P1.6 | length 19.3
  Top Layer w0.254: P1.6 12.45,-0.95 12.932,-1.432 12.932,-4.923 12.02,-5.836 D2.3 12.985,-9.65 13.235,-9.4 C2.1 14.3,-9.55 14.927,-10.177 16.853,-10.177 20,-7.03 H3.1
NetC3_2: C3.2 D1.1 H2.1 R6.2 | length 22
  Top Layer w0.254: v1(14.3,-5.5) 15,-5.5 v1(15.9,-4.6)
  Bottom Layer w0.254: D1.1 6.8,-4.5 8.4,-4.5 C3.2 8.5,-4.7 10.9,-7.1 R6.2 14.106,-6.806 14.106,-5.694 v1(14.3,-5.5) ; v1(15.9,-4.6) 16.3,-4.2 16.3,-0.7 H2.1
NetD2_2: D2.2 D3.2 | length 4.7
  Top Layer w0.254: D3.2 11.075,-7.375 D2.2
NetD3_1: D3.1 P1.3 | length 8.7
  Top Layer w0.254: D3.1 5.5,-9.6 5.5,-7.1 9.75,-2.85 P1.3
NetG1_1: G1.1 R2.1 | length 9.8
  Top Layer w0.254: R2.1 -7.25,1.4 -6.067,2.583 -4.729,2.583 -3.919,3.392 -3.919,7.519 G1.1
NetG1_2: G1.2 R5.2 | length 2.7
  Top Layer w0.254: R5.2 -7.4,6.4 -5,6.4 G1.2
NetP1_2: P1.2 R7.2 | length 9.5
  Top Layer w0.254: R7.2 4.725,-0.1 6.525,-1.9 P1.2
NetR2_2: R2.2 T1.6 | length 7.4
  Top Layer w0.254: T1.6 -10.615,1.719 -9.115,0.219 -6.131,0.219 -5.25,1.1 R2.2
NetR3_1: R3.1 R5.1 | length 7.2
  Top Layer w0.254: v1(-9.2,5.7) -9.2,6.8 R5.1 ; v1(-9,3.9) -7.5,3.9 -7.3,3.7 R3.1
  Bottom Layer w0.254: v1(-9.2,5.7) -9.2,4.1 v1(-9,3.9)
NetR3_2: R3.2 T1.7 | length 8.2
  Top Layer w0.254: T1.7 -11.885,2.825 -9.929,4.781 -6.131,4.781 -5.25,3.9 R3.2
OD: D2.1 P1.1 | length 10.2
  Top Layer w0.254: P1.1 10.05,-0.95 11.7,-2.6 11.7,-8.07 10.17,-9.6 D2.1
SW1: H1.1 R1.2 S1.1 T1.5 | length 46.9
  Top Layer w0.254: T1.5 -9.245,2.5 v1(-8.3,2.5) ; v1(-3.3,-3.1) -3.737,-3.1 -4.387,-3.75 R1.2 -5.25,-3.9 -4.877,-4.273 -4.017,-4.273 -2.725,-5.565 S1.1
  Bottom Layer w0.254: v1(-3.3,-3.1) -3.3,-2.825 -2.8,-2.325 -2.8,-0.6 -5.9,2.5 -6.2,2.8 -6.6,2.8 -6.9,2.5 v1(-8.3,2.5) -8.2,2.5 -8.1,2.6 -3.7,7 H1.1
SW2: B1.4 B1.5 C4.2 L1.1 S1.2 | length 45.9
  Top Layer w0.254: S1.2 -4.225,-6.165 -3.494,-6.896 -3.494,-7.206 v1(-3.3,-7.4) -1.36,-7.4 -0.137,-6.176 -0.137,0.163 0.8,1.1 1.4,1.1 2.5,2.2 2.5,3.35 4.1,4.95 4.1,5.6 L1.1 4.2,5.6 6.525,5.6 6.725,5.8 v1(7,5.8)
  Bottom Layer w0.254: v1(-3.3,-7.4) -0.1,-7.4 4.75,-2.55 B1.4 B1.5 ; v1(7,5.8) 10.378,5.8 12.362,3.816 12.362,0.238 14,-1.4 C4.2
pads on no net: B1.6 P1.4 S1.3 S1.4 S1.5 S1.6 S1.7 U1.2 U1.3 U1.4

## Polygon pours and split planes (outlines as drawn)
GND on Top Layer "GND_L01_P000" (none, remove dead copper, pour order 0): -22,11.3 22.1,11.3 22.1,-10.75 -22,-10.75
GND on Bottom Layer "GND_L02_P001" (none, remove dead copper, pour order 1): -22,11.3 22.1,11.3 22.3,11.1 22.3,-10.75 -22,-10.75

## Silkscreen, mask and mechanical layers (free items; w line width, h text height)
Top Overlay:
  text "R" at -9.946,9.354 h1.52
  text "G" at -3.446,9.254 h1.52
  text "B+" at 19.004,9.004 h1.52
  text "5V" at 15.554,2.254 h1.52
  text "GND" at 13.754,-3.746 h1.52
  text "B-" at 19.004,-10.496 h1.52
Board Outline:
  the board outline again, w0.013